# Altium PCB modulo_io002.PcbDoc
Units mm, origin at the board's own origin, x right, y up, seen from the top; angles counter-clockwise.
Board outline 145 x 100 mm, 2 copper layers (Top Layer, Bottom Layer); 100 components, 96 nets, 364 pads, 0 vias.
Unrouted connection lines stored in the file: 169.
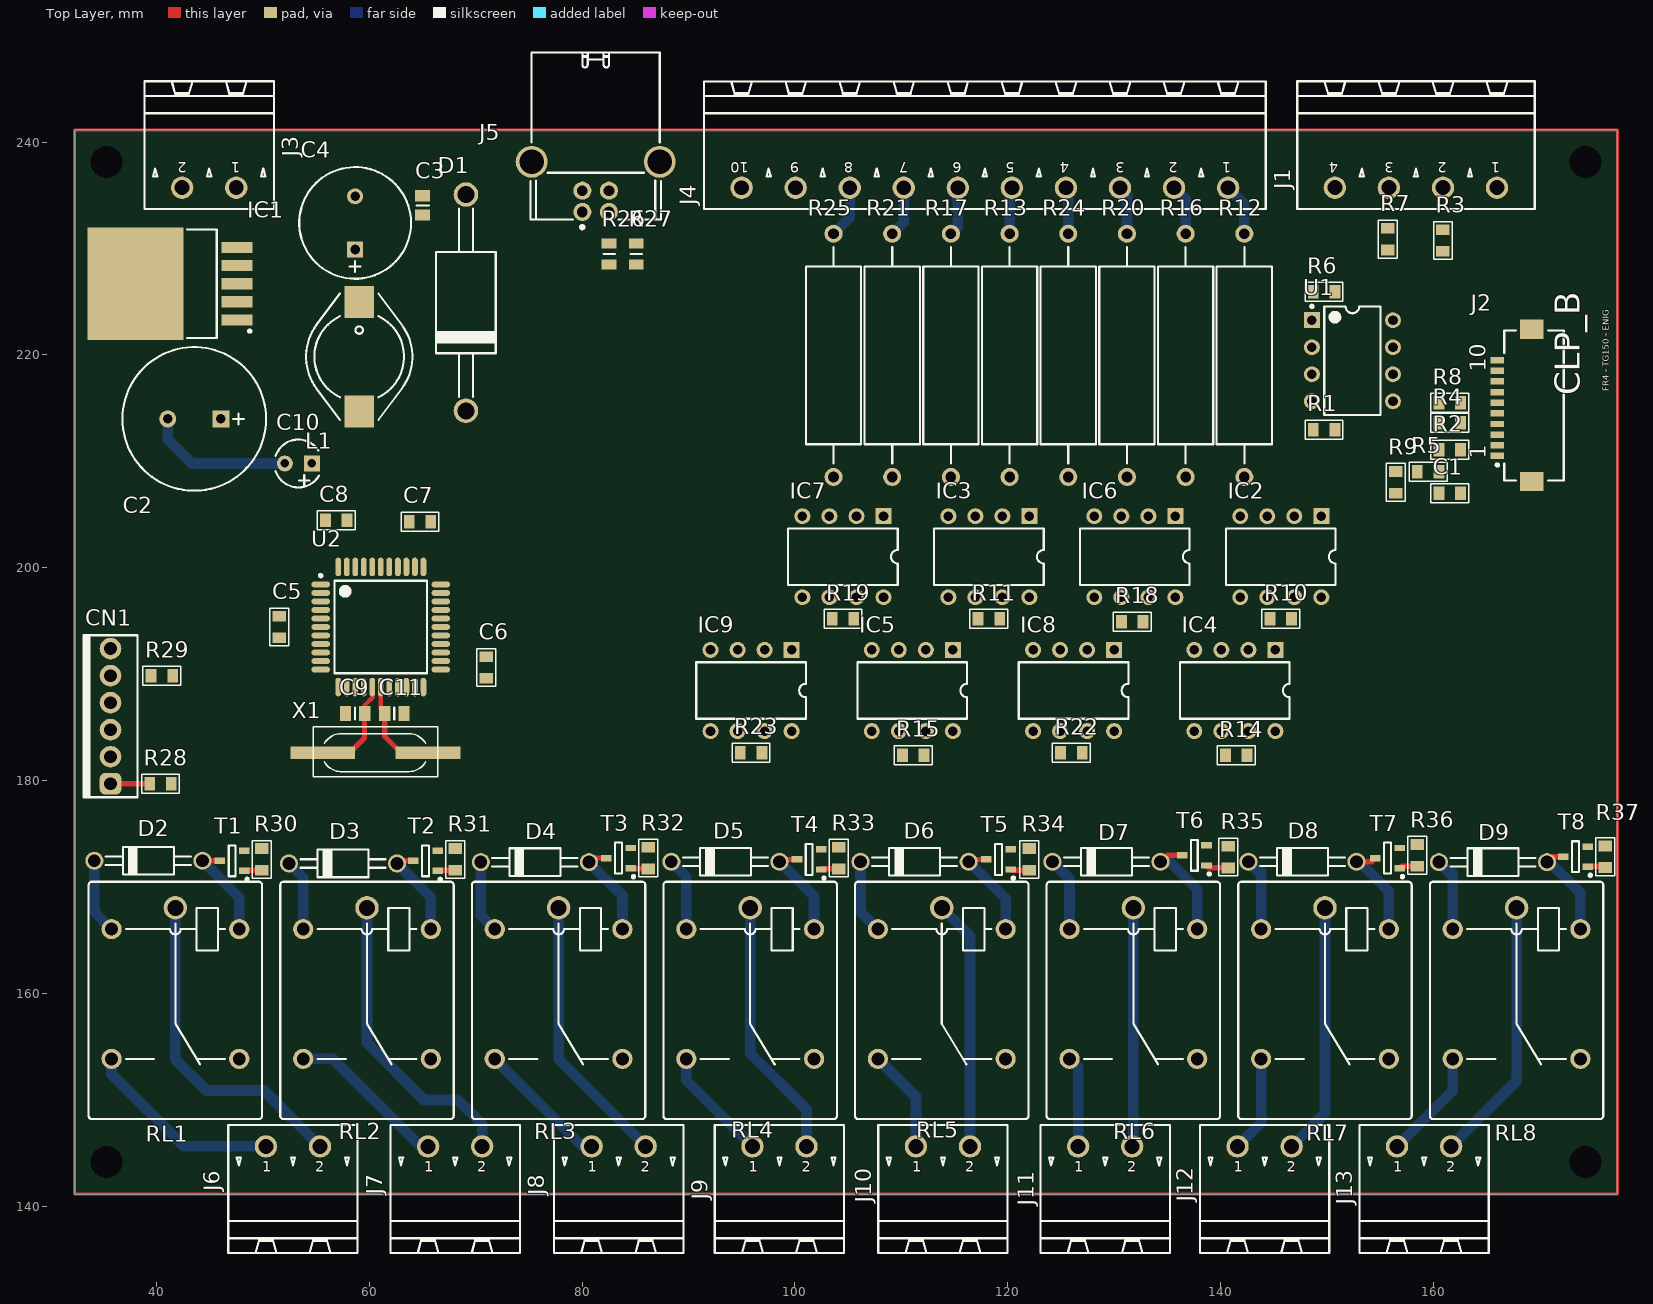
[diagram p0: Top Layer view]
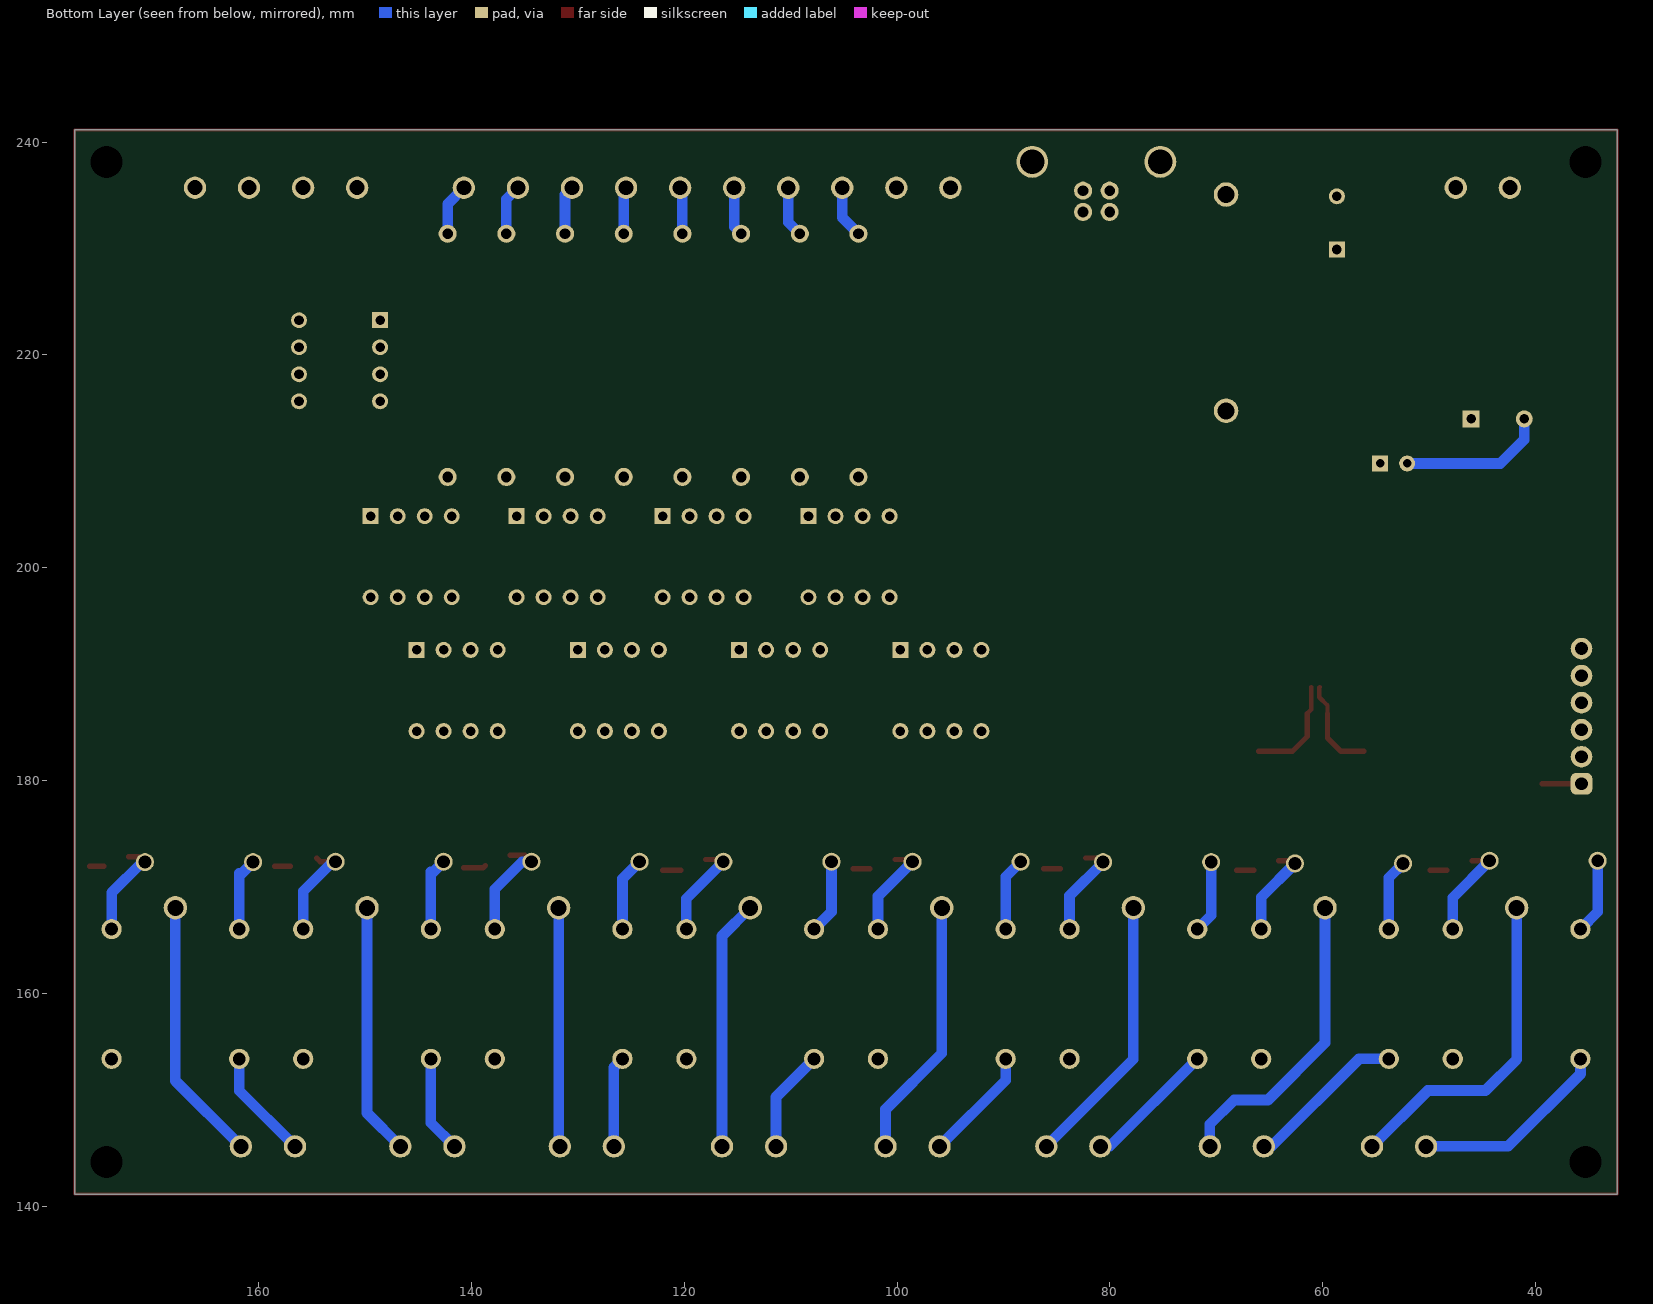
[diagram p1: Bottom Layer view, seen from below]

## Layer stack, top to bottom
Top Layer: signal copper 0.0356
Dielectric: dielectric 0.32, FR-4, Dk 4.8
Bottom Layer: signal copper 0.0356

## Board outline
32.306,141.145 32.306,241.145 177.306,241.145 177.306,141.145

## Design rules (kind name [scope] priority, off if disabled: settings)
Clearance Clearance_1 [InComponent('U2')] p1: gap=0.15
Clearance [All] p2: gap=0.254
PolygonConnect [All] p1: connectstyle=Relief reliefconductorwidth=0.254 reliefentries=4 polygonreliefangle="90 Angle"
RoutingVias [All] p1: holewidth=0.711 width=1.27 viastyle="Through Hole" minholewidth=0.711 minwidth=1.27 maxholewidth=0.711 maxwidth=1.27
SilkscreenOverComponentPads [All] p1: minsilkscreentomaskgap=0.254
SolderMaskExpansion [All] p1: expansion=0.102
Width [All] p1: maxlimit=4 minlimit=0.254 preferedwidth=1
27 further rules are at their usual default settings.

## Classes and differential pairs
component class comunicacao: C1 J1 J2 R1 R2 R3 R4 R5 R6 R7 R8 R9 U1
component class fonte: C2 C3 C4 D1 IC1 J3 L1
component class Input_dig: IC2 IC3 IC4 IC5 IC6 IC7 IC8 IC9 J4 R10 R11 R12 R13 R14 R15 R16 R17 R18 R19 R20 R21 R22 R23 R24 R25
component class microcontrolador: C5 C6 C7 C8 C9 C10 C11 CN1 J5 R26 R27 R28 R29 U2 X1
component class saida_rele: D2 D3 D4 D5 D6 D7 D8 D9 J6 J7 J8 J9 J10 J11 J12 J13 R30 R31 R32 R33 R34 R35 R36 R37 RL1 RL2 RL3 RL4 RL5 RL6 RL7 RL8 T1 T2 T3 T4 T5 T6 T7 T8

## Components (designator, comment, footprint, x,y, rotation, side; value= is the part's Value field where it differs from the comment)
C1 "100nF" 0805C-TBD 162.306,207.01 r180 top
C2 "1000uF" CAPPR500-1350X2200 43.561,213.995 r180 top
C3 "100nF" CAPC2012X135N 65.024,234.061 r270 top
C4 "100uF" CAPPR500-1050X1750 58.674,232.41 r90 top
C5 "100nF" 0805C-TBD 51.562,195.199 r270 top
C6 "100nF" 0805C-TBD 70.993,189.865 r90 top
C7 "100nF" 0805C-TBD 64.008,204.343 r0 top
C8 "100nF" 0805C-TBD 57.658,204.47 r180 top
C9 "22pF" CAPC2012X135N 58.674,186.309 r0 top
C10 "1uF" CAPPRB254-450X710 53.34,209.804 r180 top
C11 "22pF" CAPC2012X135N 62.357,186.309 r180 top
CN1 "CONECTOR 2,5 - 6VIAS AMP 880222-6" "CONECTOR 2.5 - 6 VIAS AMP 880222-6" 35.687,179.705 r270 top
D1 "1N5822" DO-201AD 69.088,224.917 r90 top
D2 "1N4007" DO-41 39.243,172.466 r0 top
D3 "1N4007" DO-41 57.531,172.212 r0 top
D4 "1N4007" DO-41 75.565,172.339 r0 top
D5 "1N4007" DO-41 93.472,172.374 r0 top
D6 "1N4007" DO-41 111.252,172.374 r0 top
D7 "1N4007" DO-41 129.286,172.374 r0 top
D8 "1N4007" DO-41 147.701,172.374 r0 top
D9 "1N4007" DO-41 165.608,172.339 r0 top
IC1 "LT1764AEQ-3.3#PBF" TO170P1394X457-6N-R900X1060 41.275,226.695 r180 top
IC2 "HCPL-2601-000E" DIP8-300 145.669,201.041 r270 top
IC3 "HCPL-2601-000E" DIP8-300 118.237,201.041 r270 top
IC4 "HCPL-2601-000E" DIP8-300 141.351,188.468 r270 top
IC5 "HCPL-2601-000E" DIP8-300 111.04,188.468 r270 top
IC6 "HCPL-2601-000E" DIP8-300 131.953,201.041 r270 top
IC7 "HCPL-2601-000E" DIP8-300 104.521,201.041 r270 top
IC8 "HCPL-2601-000E" DIP8-300 126.196,188.468 r270 top
IC9 "HCPL-2601-000E" DIP8-300 95.885,188.468 r270 top
J1 "Family" PHOENIX_1757268 158.369,235.722 r180 top
J2 "CL586-0541-8" FH12-22(10)SA-1SH 167.64,215.265 r90 top
J3 "Family" PHOENIX_1757242 44.958,235.722 r180 top
J4 "Family" PHOENIX_1757323 117.856,235.712 r180 top
J5 "USB" TYCO_292304-1 81.28,234.442 r180 top
J6 "Family" PHOENIX_1757242 52.832,145.622 r0 top
J7 "Family" PHOENIX_1757242 68.072,145.622 r0 top
J8 "Family" PHOENIX_1757242 83.439,145.622 r0 top
J9 "Family" PHOENIX_1757242 98.552,145.622 r0 top
J10 "Family" PHOENIX_1757242 113.919,145.622 r0 top
J11 "Family" PHOENIX_1757242 129.159,145.622 r0 top
J12 "Family" PHOENIX_1757242 144.145,145.622 r0 top
J13 "Family" PHOENIX_1757242 159.131,145.622 r0 top
L1 "100uH" IND_WURTH_WE-PD4_L 59.055,219.837 r270 top
R1 "56" 0805R-56 150.495,212.979 r180 top
R2 "4K7" 0805R-4K7 162.306,211.074 r180 top
R3 "56" 0805R-56 160.909,229.997 r90 top
R4 "56" 0805R-56 160.782,213.614 r0 top
R5 "4K7" 0805R-4K7 160.274,209.042 r180 top
R6 "56" 0805R-56 150.495,225.933 r180 top
R7 "56" 0805R-56 155.702,230.124 r90 top
R8 "56" 0805R-56 160.782,215.519 r0 top
R9 "4K7" 0805R-4K7 156.464,208.788 r270 top
R10 "330R" 0805R-330 146.685,195.199 r180 top
R11 "330R" 0805R-330 119.253,195.199 r180 top
R12 "4k7" RES2286-1670X520 142.24,219.964 r270 top
R13 "4k7" RES2286-1670X520 120.178,219.964 r270 top
R14 "330R" 0805R-330 142.494,182.372 r180 top
R15 "330R" 0805R-330 112.141,182.372 r180 top
R16 "4k7" RES2286-1670X520 136.725,219.964 r270 top
R17 "4k7" RES2286-1670X520 114.663,219.964 r270 top
R18 "330R" 0805R-330 132.715,194.945 r180 top
R19 "330R" 0805R-330 105.537,195.199 r180 top
R20 "4k7" RES2286-1670X520 131.209,219.964 r270 top
R21 "4k7" RES2286-1670X520 109.147,219.964 r270 top
R22 "330R" 0805R-330 127,182.626 r180 top
R23 "330R" 0805R-330 96.901,182.626 r180 top
R24 "4k7" RES2286-1670X520 125.694,219.964 r270 top
R25 "4k7" RES2286-1670X520 103.632,219.964 r270 top
R26 "22R1" RESC2012X60N 82.55,229.489 r270 top
R27 "22R1" RESC2012X60N 85.09,229.489 r270 top
R28 "1K" 0805R-1K 39.624,179.705 r0 top
R29 "10K" 0805R-10K 39.497,189.865 r0 top
R30 "10K" 0805R-10K 49.911,173.609 r270 top
R31 "10K" 0805R-10K 68.072,173.609 r270 top
R32 "10K" 0805R-10K 86.233,173.736 r270 top
R33 "10K" 0805R-10K 104.14,173.736 r270 top
R34 "10K" 0805R-10K 122.047,173.609 r270 top
R35 "10K" 0805R-10K 140.716,173.831 r270 top
R36 "10K" 0805R-10K 158.496,173.99 r270 top
R37 "10K" 0805R-10K 176.149,173.863 r270 top
RL1 "5VDC" REL_PANASONIC_JS1 41.783,159.344 r270 top
RL2 "5VDC" REL_PANASONIC_JS1 59.789,159.344 r270 top
RL3 "5VDC" REL_PANASONIC_JS1 77.795,159.344 r270 top
RL4 "5VDC" REL_PANASONIC_JS1 95.801,159.344 r270 top
RL5 "5VDC" REL_PANASONIC_JS1 113.807,159.344 r270 top
RL6 "5VDC" REL_PANASONIC_JS1 131.813,159.344 r270 top
RL7 "5VDC" REL_PANASONIC_JS1 149.819,159.344 r270 top
RL8 "5VDC" REL_PANASONIC_JS1 167.825,159.344 r270 top
T1 "BC817" SOT95P230X110-3N 47.117,172.466 r180 top
T2 "BC817" SOT95P230X110-3N 65.278,172.466 r180 top
T3 "BC817" SOT95P230X110-3N 83.439,172.72 r180 top
T4 "BC817" SOT95P230X110-3N 101.346,172.593 r180 top
T5 "BC817" SOT95P230X110-3N 119.126,172.593 r180 top
T6 "BC817" SOT95P230X110-3N 137.541,172.974 r180 top
T7 "BC817" SOT95P230X110-3N 155.702,172.72 r180 top
T8 "BC817" SOT95P230X110-3N 173.355,172.847 r180 top
U1 "SN65HVD20P" P8 152.4,219.456 r0 top
U2 "ATmega32U4-AU" 44ML_N 61.087,194.437 r0 top
X1 "16MC" XTAL-RU49/4 55.626,182.626 r0 top

## Footprints (in the part's own frame and the unit in brackets; to place one, negate y for a bottom-side part, rotate by r counter-clockwise, add the part's x,y. Pads: shape width x height; smd on the part's side, far side on the other; paste and mask are expansions set on the pad)
44ML_N [mm] "Thin QFP, 44-Leads, Body 10x10mm, Pitch 0.8mm, IPC Medium Density"
  oval 1.75x0.55 smd: 1(-5.65,4) 2(-5.65,3.2) 3(-5.65,2.4) 4(-5.65,1.6) 5(-5.65,0.8) 6(-5.65,0) 7(-5.65,-0.8) 8(-5.65,-1.6) 9(-5.65,-2.4) 10(-5.65,-3.2) 11(-5.65,-4) 23(5.65,-4) 24(5.65,-3.2) 25(5.65,-2.4) 26(5.65,-1.6) 27(5.65,-0.8) 28(5.65,0) 29(5.65,0.8) 30(5.65,1.6) 31(5.65,2.4) 32(5.65,3.2) 33(5.65,4)
  oval 0.55x1.75 smd: 12(-4,-5.65) 13(-3.2,-5.65) 14(-2.4,-5.65) 15(-1.6,-5.65) 16(-0.8,-5.65) 17(0,-5.65) 18(0.8,-5.65) 19(1.6,-5.65) 20(2.4,-5.65) 21(3.2,-5.65) 22(4,-5.65) 34(4,5.65) 35(3.2,5.65) 36(2.4,5.65) 37(1.6,5.65) 38(0.8,5.65) 39(0,5.65) 40(-0.8,5.65) 41(-1.6,5.65) 42(-2.4,5.65) 43(-3.2,5.65) 44(-4,5.65)
  silkscreen extent -5.77,-4.35 4.35,4.95, body extent -5,-5 5,5, height 1.2
0805C-TBD [mil] "CAPACITOR 0805"
  rect 40x50 smd: 1(-10,0) 2(70,0)
  silkscreen extent -40,-35 100,35, body extent -11,-25 70,25, height 26
0805R-1K [mil] "RESISTOR 0805"
  rect 40x50 smd: 1(-10,0) 2(70,0)
  silkscreen extent -40,-35 100,35, body extent -11,-25 70,25, height 27
0805R-4K7 [mil] "RESISTOR 0805"
  rect 40x50 smd: 1(-10,0) 2(70,0)
  silkscreen extent -40,-35 100,35, body extent -11,-25 70,25, height 27
0805R-10K [mil] "RESISTOR 0805"
  rect 40x50 smd: 1(0,0) 2(80,0)
  silkscreen extent -30,-35 110,35, body extent -1,-25 80,25, height 27
0805R-56 [mil] "RESISTOR 0805"
  rect 40x50 smd: 1(-10,0) 2(70,0)
  silkscreen extent -40,-35 100,35, body extent -11,-25 70,25, height 27
0805R-330 [mil] "RESISTOR 0805"
  rect 40x50 smd: 1(0,0) 2(80,0)
  silkscreen extent -30,-35 110,35, body extent -1,-25 80,25, height 27
CAPC2012X135N [mm] "Chip Capacitor, Body 2.0x1.25mm, IPC Medium Density"
  rect 1.05x1.4 smd: 1(-0.9,0) 2(0.9,0)
  silkscreen extent 0,-0.58 0,0.58, body extent -1.05,-0.67 1.05,0.68, height 1.25
CAPPR500-1050X1750 [mm] "Capacitor, Radial, Pin spacing 5.0mm - Body Diameter 10.5mm X Body Height 17.5mm"
  rect 1.5x1.5 hole 0.9: 1(-2.5,0)
  round 1.5 hole 0.9: 2(2.5,0)
  silkscreen extent -5.25,-5.25 5.25,5.25, body extent -5.25,-5.23 5.25,5.23, height 17.5
CAPPR500-1350X2200 [mm] "Capacitor, Radial, Pin spacing 5.0mm - Body Diameter 13.5mm X Body Height 22.0mm"
  rect 1.6x1.6 hole 0.9: 1(-2.5,0)
  round 1.6 hole 0.9: 2(2.5,0)
  silkscreen extent -6.75,-6.75 6.75,6.75, body extent -6.75,-6.75 6.75,6.75, height 22.5
CAPPRB254-450X710 [mm] "Capacitor, Polarized Radial Bead, Pin spacing 2.54mm - Body Diameter 4.5mm X Body Height 7.1mm"
  rect 1.5x1.5 hole 0.8: 1(-1.27,0)
  round 1.5 hole 0.8: 2(1.27,0)
  silkscreen extent -1.93,-2.25 2.13,2.25, body extent -2.25,-2.25 2.25,2.25, height 7.08
"CONECTOR 2.5 - 6 VIAS AMP 880222-6" [mil]
  rrect50% 80x80 hole 47.24: 1(0,0)
  round 80 hole 47.24: 2(-100,0) 3(-200,0) 4(-300,0) 5(-400,0) 6(-500,0)
  silkscreen extent -550,-100 50,100, body extent -543,-99 48,98, height 398
DIP8-300 [mm] "DIP 8 Leads, Row Spacing 7.62 mm; Pitch 2.54 mm"
  rect 1.5x1.5 hole 0.9: 1(-3.81,3.81)
  round 1.5 hole 0.9: 2(-3.81,1.27) 3(-3.81,-1.27) 4(-3.81,-3.81) 5(3.81,-3.81) 6(3.81,-1.27) 7(3.81,1.27) 8(3.81,3.81)
  silkscreen extent -2.65,-5.15 2.65,5.15, body extent -3.93,-5.08 3.94,5.08, height 5.33
DO-41 [mm] "DO-41, Diode, Axial, Body 4.7 x 2.7 mm (LxDia. max), Pin spacing 10.16mm"
  round 1.7 hole 1.2: 1(-5.08,0) 2(5.08,0)
  silkscreen extent -4,-1.3 4,1.3, body extent -5.48,-1.3 5.48,1.3, height 2.6
DO-201AD [mm] "DO-201AD, Diode, Axial; Lead Spacing 20.32mm, Lead Dia. 1.3mm, Body Length 9.5mm, Body Dia. 5.6mm"
  round 2.3 hole 1.6: 1(-10.16,0) 2(10.16,0)
  silkscreen extent -8.85,-2.8 8.85,2.8, body extent -10.81,-2.8 10.81,2.8, height 5.6
FH12-22(10)SA-1SH [mm] "Connector; FH12 Series; 10 Position; 1.0mm Spaced Bottom Eccentric Contact"
  rect 0.6x1.3 smd: 1(-4.75,1.625) 2(-3.75,1.625) 3(-2.75,1.625) 4(-1.75,1.625) 5(-0.75,1.625) 6(0.25,1.625) 7(1.25,1.625) 8(2.25,1.625) 9(3.25,1.625) 10(4.25,1.625)
  rect 1.8x2.2 smd: 11(7.15,-1.625) 12(-7.15,-1.625)
  silkscreen extent -7.05,-4.62 7.05,1.75
IND_WURTH_WE-PD4_L [mm] "SMD Power Choke, Width 10mm Body Lenght 12.7mm Height 5.3mm, WURTH WE-PD 4 Serie Type L"
  rect 3x2.8 smd: 1(-5.15,0) 2(5.15,0)
  silkscreen extent -5.95,-5 5.95,5, body extent -6.35,-4.99 6.35,4.99, height 5
P8 [mm] "DIP, 8-Leads, Row Spacing 7.62mm, Pitch 2.54mm, Body 9.6x6.4mm"
  rect 1.5x1.5 hole 0.9: 1(-3.81,3.81)
  round 1.5 hole 0.9: 2(-3.81,1.27) 3(-3.81,-1.27) 4(-3.81,-3.81) 5(3.81,-3.81) 6(3.81,-1.27) 7(3.81,1.27) 8(3.81,3.81)
  silkscreen extent -3.93,-5.1 2.65,5.23, body extent -3.3,-5.07 3.3,5.07, height 5.08
PHOENIX_1757242 [mm] "PHOENIX MSTBA Serie, Pitch 5.08mm, 12A, 250V, 2 Positions Header"
  round 2.1 hole 1.4: 1(-2.54,0) 2(2.54,0)
  silkscreen extent -6.08,-10 6.08,2, body extent -6.08,-10 6.08,2, height 8.6
PHOENIX_1757268 [mm] "PHOENIX MSTBA Serie, Pitch 5.08mm, 12A, 250V, 4 Positions Header"
  round 2.1 hole 1.4: 1(-7.62,0) 2(-2.54,0) 3(2.54,0) 4(7.62,0)
  silkscreen extent -11.16,-10 11.16,2, body extent -11.16,-10 11.16,2, height 8.6
PHOENIX_1757323 [mm] "PHOENIX MSTBA Serie, Pitch 5.08mm, 12A, 250V, 10 Positions Header"
  round 2.1 hole 1.4: 1(-22.86,0) 2(-17.78,0) 3(-12.7,0) 4(-7.62,0) 5(-2.54,0) 6(2.54,0) 7(7.62,0) 8(12.7,0) 9(17.78,0) 10(22.86,0)
  silkscreen extent -26.4,-10 26.4,2, body extent -26.4,-10 26.4,2, height 8.6
REL_PANASONIC_JS1 [mm] "5 Leads Relay, Row Spacing 12 mm; Body 22mm x 16mm, JS Serie"
  round 2.2 hole 1.5: 1(-8.7,0)
  round 1.9 hole 1.2: 2(-6.7,-6) 3(5.5,-6) 4(5.5,6) 5(-6.7,6)
  silkscreen extent -11.15,-8.15 11.15,8.15, body extent -11.15,-8.15 11.15,8.15, height 16.7
RES2286-1670X520 [mm] "Resistor, Axial, Pad spacing 22.22 mm - Body Lengh 16.7mm X Body Diameter 5.2mm"
  round 1.7 hole 1: 1(-11.43,0) 2(11.43,0)
  silkscreen extent -10.16,-2.6 10.16,2.6, body extent -11.82,-2.6 11.82,2.6, height 5.2
RESC2012X60N [mm] "Chip Resistor, EIA 0805, Metric 2012, Body 2.0x1.2mm, IPC Medium Density"
  rect 0.95x1.4 smd: 1(-1,0) 2(1,0)
  silkscreen extent 0,-0.55 0,0.55, body extent -1.1,-0.67 1.1,0.68, height 0.6
SOT95P230X110-3N [mm] "SOT23, 3 pin, Pitch 0.95mm - 1.3mm W X 2.9mm L X 1.1mm H, IPC Medium Density"
  rect 1x0.6 smd: 1(-1.15,0.95) 2(-1.15,-0.95) 3(1.15,0)
  silkscreen extent -1.53,-1.45 0.33,1.87, body extent -1.17,-1.5 1.33,1.5, height 1.1
TO170P1394X457-6N-R900X1060 [mm] "TO, 1.70mm Pitch; 5 Pin, 13.945mm L X 8.89mm W X 4.572mm H body, IPC Medium Density"
  rect 2.95x1.05 smd: 1(-6.3,3.4) 2(-6.3,1.7) 3(-6.3,0) 4(-6.3,-1.7) 5(-6.3,-3.4)
  rect 9x10.6 smd: 6(3.25,0)
  silkscreen extent -7.63,-5.1 -1.6,5.1, body extent -6.93,-5.27 7.11,5.27, height 4.63
TYCO_292304-1 [mm] "Thru Hole, Right Angle, 4 Position, Type B, USB Receptacle"
  round 1.7 hole 1: 1(1.25,1) 2(-1.25,1) 3(-1.25,-1) 4(1.25,-1)
  round 3 hole 2.3: 5(-6.02,-3.71) 5(6.02,-3.71)
  silkscreen extent -6.13,-13.98 6.13,2.58, body extent -7.19,-13.98 7.19,1.72, height 11.5
XTAL-RU49/4 [mil]
  rect 240x47.24 smd: 1(0,0) 2(390,0)
  silkscreen extent -35,-90 425,95, body extent -78,-90 468,95, height 120

## Part data
C1 C5 C6 C7 C8: library part 0805C-100nF-25V-X7R-MUR, "CAPACITOR 0805 CERAMIC"
C2: library part CAER_1000UF_35V_20%_VISHAY_MAL203850102E3, "Polarised capacitor"
C3: library part CC0805_100NF_50V_10%_X7R, "Non-polarised capacitor"
C4: library part CAER_100UF_63V_20%_500-1050X1750_LESR0R190, "Polarised capacitor"
C9 C11: library part CC0805_22PF_50V_5%_NP0, "Non-polarised capacitor"
C10: library part CTEB_1UF_35V_10%_254-450X710, "Polarised capacitor"
D1: "Schottky Diode"
D2 D3 D4 D5 D6 D7 D8 D9: "Diode"
IC1: "3A, Fast Transient Response, Low Noise, LDO Regulators"
IC2 IC3 IC4 IC5 IC6 IC7 IC8 IC9: "Single Optocoupler"
J1: library part PHOENIX_1757268, "Connector 4 Male"
J2: "FH12 Series, \"Flip-Lock\" SMT/ZIF FFC/FPC Connector - 1.0mm Spaced Bottom Eccentric Contact"
J3 J6 J7 J8 J9 J10 J11 J12 J13: library part PHOENIX_1757242, "Connector 2 Male"
J4: library part PHOENIX_1757323, "Connector 10 Male"
J5: library part TYCO_292304-1, "4 Pin + 1 Shield USB Receptacle"
L1: library part IND_3.3UH_20%_WURTH_WE-PD4_74456033, "Inductor With Magnetic core"
R1 R3 R4 R6 R7 R8: library part 0805R-56, "RESISTOR 0805 1/4 WATT THIN FILM"
R2 R5 R9: library part 0805R-4K7, "RESISTOR 0805 1/4 WATT THIN FILM"
R10 R11 R14 R15 R18 R19 R22 R23: library part 0805R-330, "RESISTOR 0805 1/4 WATT THIN FILM"
R12 R13 R16 R17 R20 R21 R24 R25: library part RMF_4K7_5%_3W_250PPM_2286-1670X520, "Resistor - 5%"
R26 R27: library part R0805_22R1_0.1%_0.1W_10PPM, "Resistor - 0.1%"
R28: library part 0805R-1K, "RESISTOR 0805 1/4 WATT THIN FILM"
R29 R30 R31 R32 R33 R34 R35 R36 R37: library part 0805R-10K, "RESISTOR 0805 1/4 WATT THIN FILM"
RL1 RL2 RL3 RL4 RL5 RL6 RL7 RL8: library part REL_PANASONIC_JS1-5V-F, "10A SPDT PCB Relay, JS Serie"
T1 T2 T3 T4 T5 T6 T7 T8: "NPN Transistor"
U1: "Extended Common-mode RS-485 Transceiver, 25 Mbps, 5 V, Half Duplex, -40 to 85 degC, 8-pin PDIP (P), Pb-Free (RoHS)"
U2: "8-bit AVR Microcontroller, 2.7-5.5V, 16MHz, 32KB Flash, 1KB EEPROM, 2.5KB SRAM, USB Controller, 44-pin TQFP, Industrial Grade (-40°C to 85°C), Ext Osc"
X1: library part 16MC-HC49US, "16MHZ CRSYTAL HC49US"

## Free pads (board coordinates)
  round 1.524 hole 3: 0(35.306,144.145) 0(35.306,238.145) 0(174.306,144.145) 0(174.306,238.145)

## Nets (pads, with @x,y where several pads share a name; then routed paths per layer and width w, separated by ;. In a path a pad name is that pad's centre, name@x,y a point inside that pad or via, vN(x,y) a via of type N, cw(c..) or ccw(c..) an arc to the next point about the centre after c; other vN are vias at no path point)
5V: C1.1 C2.1 C5.2 C6.2 C7.2 C8.2 CN1.5 IC1.4 IC2.7 IC2.8 IC3.7 IC3.8 IC4.7 IC4.8 IC5.7 IC5.8 IC6.7 IC6.8 IC7.7 IC7.8 IC8.7 IC8.8 IC9.7 IC9.8 J2.2 J5.1 L1.2 R2.1 R10.1 R11.1 R14.1 R15.1 R18.1 R19.1 R22.1 R23.1 R29.1 U1.8 U2.2 U2.7 U2.14 U2.24 U2.34 U2.44
24V: C3.2 C4.1 D2.1 D3.1 D4.1 D5.1 D6.1 D7.1 D8.1 D9.1 IC1.1 J1.4 J3.2 RL1.2 RL2.2 RL3.2 RL4.2 RL5.2 RL6.2 RL7.2 RL8.2 | length 55
  Bottom Layer w1: D2.1 34.163,167.664 RL1.2 ; D3.1 53.789,170.874 RL2.2 ; D4.1 70.485,167.354 RL3.2 ; D5.1 89.801,170.965 RL4.2 ; D6.1 106.172,167.679 RL5.2 ; D7.1 125.813,170.767 RL6.2 ; D8.1 143.565,171.43 ; RL7.2 143.819,171.43 ; D9.1 161.571,171.296 ; RL8.2 161.825,171.296
GND: C1.2 C2.2 C3.1 C4.2 C5.1 C6.1 C7.1 C8.1 C9.1 C10.2 C11.1 CN1.6 D1.2 IC1.3 IC1.5 IC2.5 IC3.5 IC4.5 IC5.5 IC6.5 IC7.5 IC8.5 IC9.5 J1.1 J2.9 J2.10 J2.11 J2.12 J3.1 J5.4 R9.2 T1.2 T2.2 T3.2 T4.2 T5.2 T6.2 T7.2 T8.2 U1.5 U2.5 U2.15 U2.23 U2.35 U2.43 | length 13.9
  Bottom Layer w1: C2.2 41.061,212.05 43.307,209.804 C10.2
GND_2: IC2.3 IC3.3 IC4.3 IC5.3 IC6.3 IC7.3 IC8.3 IC9.3 J4.9 J4.10
NetC9_2: C9.2 U2.16 X1.1 | length 9.1
  Top Layer w0.4: C9.2@59.563,186.309 59.563,187.071 60.325,187.833 60.325,188.749 U2.16
  Top Layer w0.5: X1.1@56.134,182.753 58.293,182.753 59.563,184.023 C9.2@59.563,186.309
NetC10_1: C10.1 U2.6
NetC11_2: C11.2 U2.17 X1.2 | length 9.9
  Top Layer w0.4: U2.17 61.087,186.679 C11.2
  Top Layer w0.5: C11.2 61.457,184.161 62.865,182.753 X1.2@66.04,182.753
NetCN1_1: CN1.1 R28.1 | length 3.7
  Top Layer w0.5: CN1.1 R28.1
NetCN1_2: CN1.2 U2.11
NetCN1_3: CN1.3 U2.10
NetCN1_4: CN1.4 U2.9
NetD1_1: D1.1 IC1.2 L1.1
NetD2_2: D2.2 RL1.5 T1.3 | length 9.5
  Top Layer w0.5: D2.2 T1.3
  Bottom Layer w1: D2.2 47.783,169.006 RL1.5
NetD3_2: D3.2 RL2.5 T2.3 | length 8.7
  Top Layer w0.5: D3.2@62.865,172.466 T2.3
  Bottom Layer w1: D3.2 65.789,169.034 RL2.5
NetD4_2: D4.2 RL3.5 T3.3 | length 8.9
  Top Layer w0.5: D4.2@81.026,172.72 T3.3
  Bottom Layer w1: D4.2 83.795,169.189 RL3.5
NetD5_2: D5.2 RL4.5 T4.3 | length 9.1
  Top Layer w0.5: D5.2@98.771,172.593 T4.3
  Bottom Layer w1: D5.2 101.801,169.125 RL4.5
NetD6_2: D6.2 RL5.5 T5.3 | length 9.5
  Top Layer w0.5: D6.2 116.551,172.593 T5.3
  Bottom Layer w1: D6.2 119.807,168.899 RL5.5
NetD7_2: D7.2 RL6.5 T6.3 | length 10.5
  Top Layer w0.5: D7.2 134.966,172.974 T6.3
  Bottom Layer w1: D7.2 135.22,172.374 137.813,169.781 RL6.5
NetD8_2: D8.2 RL7.5 T7.3 | length 9.4
  Top Layer w0.5: D8.2 154.206,172.374 T7.3
  Bottom Layer w1: D8.2@153.035,172.374 155.819,169.59 RL7.5
NetD9_2: D9.2 RL8.5 T8.3 | length 8.5
  Top Layer w0.5: D9.2@171.196,172.847 T8.3
  Bottom Layer w1: D9.2@170.942,172.339 173.825,169.456 RL8.5
NetIC2_2: IC2.2 R12.2
NetIC2_6: IC2.6 R10.2 U2.31
NetIC3_2: IC3.2 R13.2
NetIC3_6: IC3.6 R11.2 U2.38
NetIC4_2: IC4.2 R16.2
NetIC4_6: IC4.6 R14.2 U2.32
NetIC5_2: IC5.2 R17.2
NetIC5_6: IC5.6 R15.2 U2.39
NetIC6_2: IC6.2 R20.2
NetIC6_6: IC6.6 R18.2 U2.36
NetIC7_2: IC7.2 R21.2
NetIC7_6: IC7.6 R19.2 U2.40
NetIC8_2: IC8.2 R24.2
NetIC8_6: IC8.6 R22.2 U2.37
NetIC9_2: IC9.2 R25.2
NetIC9_6: IC9.6 R23.2 U2.41
NetJ1_2: J1.2 R3.2
NetJ1_3: J1.3 R7.2
NetJ2_1: J2.1 J2.3
NetJ2_5: J2.5 R4.2
NetJ2_6: J2.6 R8.2
NetJ2_7: J2.7 U2.12
NetJ4_1: J4.1 R12.1 | length 4.9
  Bottom Layer w1: J4.1 142.24,234.188 R12.1
NetJ4_2: J4.2 R16.1 | length 4.8
  Bottom Layer w1: J4.2 136.725,234.623 R16.1
NetJ4_3: J4.3 R20.1 | length 4.6
  Bottom Layer w1: J4.3 131.209,235.059 R20.1
NetJ4_4: J4.4 R24.1 | length 4.4
  Bottom Layer w1: J4.4 125.694,235.494 R24.1
NetJ4_5: J4.5 R13.1 | length 4.4
  Bottom Layer w1: R13.1 120.178,235.494 J4.5
NetJ4_6: J4.6 R17.1 | length 4.6
  Bottom Layer w1: R17.1 115.316,232.047 J4.6
NetJ4_7: J4.7 R21.1 | length 4.8
  Bottom Layer w1: R21.1 110.236,232.483 J4.7
NetJ4_8: J4.8 R25.1 | length 4.9
  Bottom Layer w1: R25.1 105.156,232.918 J4.8
NetJ5_2: J5.2 R26.1
NetJ5_3: J5.3 R27.1
NetJ6_1: J6.1 RL1.3 | length 18.7
  Bottom Layer w1: RL1.3 35.783,152.431 42.592,145.622 J6.1
NetJ6_2: J6.2 RL1.1 | length 31.2
  Bottom Layer w1: RL1.1 41.783,153.797 44.704,150.876 50.118,150.876 J6.2
NetJ7_1: J7.1 RL2.3 | length 15.1
  Bottom Layer w1: RL2.3 56.595,153.844 64.817,145.622 J7.1
NetJ7_2: J7.2 RL2.1 | length 28.8
  Bottom Layer w1: RL2.1 59.789,155.349 65.151,149.987 68.326,149.987 70.612,147.701 J7.2
NetJ8_1: J8.1 RL3.3 | length 12.5
  Bottom Layer w1: RL3.3 80.017,145.622 J8.1
NetJ8_2: J8.2 RL3.1 | length 25.8
  Bottom Layer w1: RL3.1 77.795,153.806 J8.2
NetJ9_1: J9.1 RL4.3 | length 10.8
  Bottom Layer w1: RL4.3 89.801,151.833 J9.1
NetJ9_2: J9.2 RL4.1 | length 24.6
  Bottom Layer w1: RL4.1 95.801,154.389 101.092,149.098 J9.2
NetJ10_1: J10.1 RL5.3 | length 9.7
  Bottom Layer w1: RL5.3 111.379,150.272 J10.1
NetJ10_2: J10.2 RL5.1 | length 23.5
  Bottom Layer w1: RL5.1 116.459,165.392 J10.2
NetJ11_1: J11.1 RL6.3 | length 8.6
  Bottom Layer w1: RL6.3 126.619,153.038 J11.1
NetJ11_2: J11.2 RL6.1 | length 22.3
  Bottom Layer w1: J11.2@131.813,145.736 RL6.1
NetJ12_1: J12.1 RL7.3 | length 9.1
  Bottom Layer w1: J12.1 143.819,147.836 RL7.3
NetJ12_2: J12.2 RL7.1 | length 23.7
  Bottom Layer w1: J12.2 149.819,148.756 RL7.1
NetJ13_1: J13.1 RL8.3 | length 10.4
  Bottom Layer w1: J13.1 161.825,150.856 RL8.3
NetJ13_2: J13.2 RL8.1 | length 25
  Bottom Layer w1: J13.2 167.825,151.776 RL8.1
NetR1_1: R1.1 R4.1 U2.21
NetR1_2: R1.2 U1.4
NetR2_2: R2.2 R5.1
NetR3_1: R3.1 U1.6
NetR5_2: R5.2 R9.1
NetR6_1: R6.1 R8.1 U2.20
NetR6_2: R6.2 U1.1
NetR7_1: R7.1 U1.7
NetR26_2: R26.2 U2.3
NetR27_2: R27.2 U2.4
NetR28_2: R28.2 R29.2 U2.13
NetR30_1: R30.1 U2.18
NetR30_2: R30.2 T1.1 | length 1.6
  Top Layer w0.5: T1.1@48.328,171.577 R30.2
NetR31_1: R31.1 U2.19
NetR31_2: R31.2 T2.1 | length 1.6
  Top Layer w0.5: T2.1@66.489,171.577 R31.2
NetR32_1: R32.1 U2.25
NetR32_2: R32.2 T3.1 | length 1.6
  Top Layer w0.5: T3.1@84.655,171.704 R32.2
NetR33_1: R33.1 U2.26
NetR33_2: R33.2 T4.1 | length 1.6
  Top Layer w0.5: T4.1@102.557,171.704 R33.2
NetR34_1: R34.1 U2.27
NetR34_2: R34.2 T5.1 | length 1.7
  Top Layer w0.5: T5.1@120.342,171.577 R34.2
NetR35_1: R35.1 U2.28
NetR35_2: R35.2 T6.1 | length 2.1
  Top Layer w0.5: T6.1 138.916,171.799 R35.2
NetR36_1: R36.1 U2.29
NetR36_2: R36.2 T7.1 | length 1.5
  Top Layer w0.5: T7.1@157.04,171.958 R36.2
NetR37_1: R37.1 U2.30
NetR37_2: R37.2 T8.1 | length 1.3
  Top Layer w0.5: T8.1@174.566,171.958 R37.2@175.895,171.958
NetU1_2: U1.2 U1.3 U2.1
pads on no net: IC1.6 IC2.1 IC2.4 IC3.1 IC3.4 IC4.1 IC4.4 IC5.1 IC5.4 IC6.1 IC6.4 IC7.1 IC7.4 IC8.1 IC8.4 IC9.1 IC9.4 J2.4 J2.8 J5.5 RL1.4 RL2.4 RL3.4 RL4.4 RL5.4 RL6.4 RL7.4 RL8.4 U2.8 U2.22 U2.33 U2.42
copper on no net: | length 490
  Top Layer w0.254: 32.306,141.145 177.306,141.145 177.306,241.145 32.306,241.145 32.306,141.145

## Silkscreen, mask and mechanical layers (free items; w line width, h text height)
Top Overlay:
  text "FR4 - TG150 - ENIG" at 176.705,216.583 h1 r90
  text "CLP_B" at 174.546,216.202 h4 r90

## Text inside footprints (layer, text, board x,y; h text height)
J1: Top Overlay "4" at 151.069,238.122 h1 r180; Top Overlay "1" at 166.269,238.122 h1 r180; Top Overlay "2" at 161.269,238.122 h1 r180; Top Overlay "3" at 156.269,238.122 h1 r180
J2: Top Overlay "10" at 164.915,218.415 h1.5 r90; Top Overlay "1" at 164.915,210.265 h1.5 r90
J3: Top Overlay "1" at 47.858,238.122 h1 r180; Top Overlay "2" at 42.858,238.122 h1 r180
J4: Top Overlay "3" at 130.996,238.112 h1 r180; Top Overlay "2" at 135.996,238.112 h1 r180; Top Overlay "1" at 140.996,238.112 h1 r180; Top Overlay "4" at 125.796,238.112 h1 r180; Top Overlay "7" at 110.676,238.112 h1 r180; Top Overlay "6" at 115.676,238.112 h1 r180; Top Overlay "5" at 120.676,238.112 h1 r180; Top Overlay "8" at 105.476,238.112 h1 r180; Top Overlay "9" at 100.396,238.112 h1 r180; Top Overlay "10" at 95.656,238.112 h1 r180
J6: Top Overlay "1" at 49.932,143.222 h1; Top Overlay "2" at 54.932,143.222 h1
J7: Top Overlay "1" at 65.172,143.222 h1; Top Overlay "2" at 70.172,143.222 h1
J8: Top Overlay "1" at 80.539,143.222 h1; Top Overlay "2" at 85.539,143.222 h1
J9: Top Overlay "1" at 95.652,143.222 h1; Top Overlay "2" at 100.652,143.222 h1
J10: Top Overlay "1" at 111.019,143.222 h1; Top Overlay "2" at 116.019,143.222 h1
J11: Top Overlay "1" at 126.259,143.222 h1; Top Overlay "2" at 131.259,143.222 h1
J12: Top Overlay "1" at 141.245,143.222 h1; Top Overlay "2" at 146.245,143.222 h1
J13: Top Overlay "1" at 156.231,143.222 h1; Top Overlay "2" at 161.231,143.222 h1